# EAGLE board NMPavi280wires (EAGLE 9.6.2)
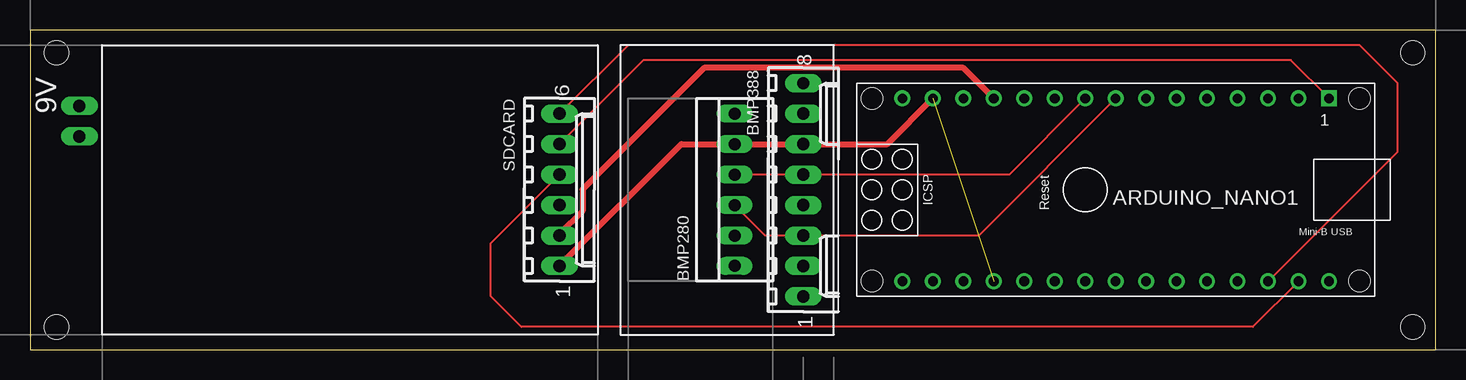
[diagram p0: board, top side]
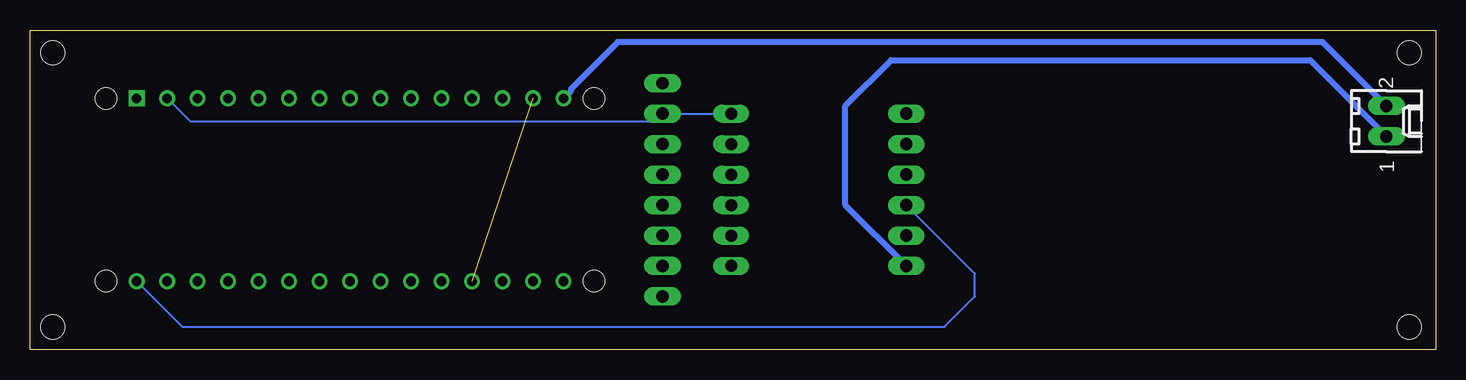
[diagram p1: board, bottom side, seen from below]

Size 117.14 x 26.65 mm. Coordinates in mm from the lower left corner, seen from the top.
Outline: 117.14,0 117.14,26.65 0,26.65 0,0 117.14,0
Copper layers (1*16): Top 0.035mm / dielectric 1.5mm / Bottom 0.035mm
Design rules "default *": minimum track width 6mil, minimum drill 0.35mm, track to track 6mil, track to pad 6mil, pad to pad 6mil, via to via 6mil, smd to smd 6mil, copper to edge 30mil, drill to drill 6mil, minimum pad ring 10mil, minimum via ring 8mil, stop-mask expansion 4mil, vias tented up to drill 0mil, thermal gap 10mil
Holes 2 mm at 115.24,1.91 115.24,24.77 2.21,1.91 2.21,24.77

## Footprints (pad centres in the part's own frame; a part is rotated, then mirrored left to right if it is on the bottom)
ARDUINO_NANO = drill 0.8 square: 1 -20.32,-7.62 | drill 0.8: 2 -17.78,-7.62; 3 -15.24,-7.62; 4 -12.7,-7.62; 5 -10.16,-7.62; 6 -7.62,-7.62; 7 -5.08,-7.62; 8 -2.54,-7.62; 9 0,-7.62; 10 2.54,-7.62; 11 5.08,-7.62; 12 7.62,-7.62; 13 10.16,-7.62; 14 12.7,-7.62; 15 15.24,-7.62; 16 15.24,7.62; 17 12.7,7.62; 18 10.16,7.62; 19 7.62,7.62; 20 5.08,7.62; 21 2.54,7.62; 22 0,7.62; 23 -2.54,7.62; 24 -5.08,7.62; 25 -7.62,7.62; 26 -10.16,7.62; 27 -12.7,7.62; 28 -15.24,7.62; 29 -17.78,7.62; 30 -20.32,7.62 | hole 1.778: -22.86,-7.62; -22.86,7.62; 17.78,7.62; 17.78,-7.62
6410-02 = drill 1.016 long: 1 1.27,0; 2 -1.27,0
22-23-2061 = drill 1 long: 1 -6.35,0; 2 -3.81,0; 3 -1.27,0; 4 1.27,0; 5 3.81,0; 6 6.35,0
6410-08 = drill 1.016 long: 1 8.89,0; 2 6.35,0; 3 3.81,0; 4 1.27,0; 5 -1.27,0; 6 -3.81,0; 7 -6.35,0; 8 -8.89,0
6410-06 = drill 1.016 long: 1 6.35,0; 2 3.81,0; 3 1.27,0; 4 -1.27,0; 5 -3.81,0; 6 -6.35,0

## Placement (x,y rotation side)
ARDUINO_NANO1  [ARDUINO_NANO]  87.93,13.33 180 top
BATTERY  22-27-2021-02  [6410-02]  4.11,19.05 270 bottom
BMP280  [22-23-2061]  58.73,13.33 90 top
BMP388  22-27-2081-08  [6410-08]  64.44,13.33 270 top
SDCARD  22-27-2061-06  [6410-06]  44.12,13.33 270 top

## Library data of the parts
ARDUINO_NANO1 = ArduinoNanoV30
BATTERY BMP388 SDCARD = con-molex; MF: MOLEX; OC_FARNELL: unknown; OC_NEWARK: unknown
BMP280 = con-molex@1; MF: MOLEX; MPN: 22-23-2061; OC_FARNELL: 1462922; OC_NEWARK: 27C1933

## Nets
3VO: ARDUINO_NANO1.2 BMP280.6 BMP388.7
9V: ARDUINO_NANO1.15 BATTERY.2
CS: ARDUINO_NANO1.28 SDCARD.6
GND: ARDUINO_NANO1.14 ARDUINO_NANO1.19 BATTERY.1 BMP280.5 BMP388.6 SDCARD.1
MOSI: ARDUINO_NANO1.29 SDCARD.4
MOSO: ARDUINO_NANO1.30 SDCARD.3
SCK: ARDUINO_NANO1.1 SDCARD.5
SCL: ARDUINO_NANO1.9 BMP280.4 BMP388.5
SDA: ARDUINO_NANO1.8 BMP280.3 BMP388.3
VCC: ARDUINO_NANO1.12 SDCARD.2

## Tracks (layer width: path | path; a pad name or v marks a point on that pad's centre or on a via)
3VO
  Bottom 0.152: ARDUINO_NANO1.2 103.81,19.05 65.08,19.05 BMP388.7 BMP280.6
9V
  Bottom 0.508: BATTERY.2 9.43,25.63 68.17,25.63 72.06,21.74 72.06,21.59 ARDUINO_NANO1.15
CS
  Top 0.152: ARDUINO_NANO1.28 113.97,16.51 113.97,22.22 110.8,25.4 49.83,25.4 SDCARD.6
GND  (1 unrouted)
  Top 0.508: SDCARD.1 54.28,17.14 BMP280.5 BMP388.6 71.42,17.14 ARDUINO_NANO1.14
  Bottom 0.508: SDCARD.1 49.2,12.06 49.2,20.32 45.39,24.13 10.47,24.13 BATTERY.1
MOSI
  Top 0.152: ARDUINO_NANO1.29 101.9,1.91 40.94,1.91 38.41,4.45 38.41,8.89 SDCARD.4
MOSO
  Bottom 0.152: ARDUINO_NANO1.30 104.45,1.91 40.94,1.91 38.41,4.45 38.41,6.35 SDCARD.3
SCK
  Top 0.152: ARDUINO_NANO1.1 105.08,24.13 51.11,24.13 SDCARD.5
SCL
  Top 0.152: ARDUINO_NANO1.9 81.58,14.61 BMP388.5 BMP280.4
SDA
  Top 0.152: ARDUINO_NANO1.8 79.05,9.53 BMP388.3 61.27,9.53 BMP280.3
VCC
  Top 0.508: ARDUINO_NANO1.12 77.77,23.5 56.19,23.5 46.05,13.36 46.05,11.58 44.12,9.65 SDCARD.2

## Text on the board
tPlace: 9V